# Altium PCB PCBGroupie.PcbDoc
Units mm, origin at the board's own origin, x right, y up, seen from the top; angles counter-clockwise.
Board outline 80.95 x 53.19 mm, 2 copper layers (Top Layer, Bottom Layer), stack 1.57 mm thick; 33 components, 36 nets, 133 pads, 1 vias.
Unrouted connection lines stored in the file: 25.
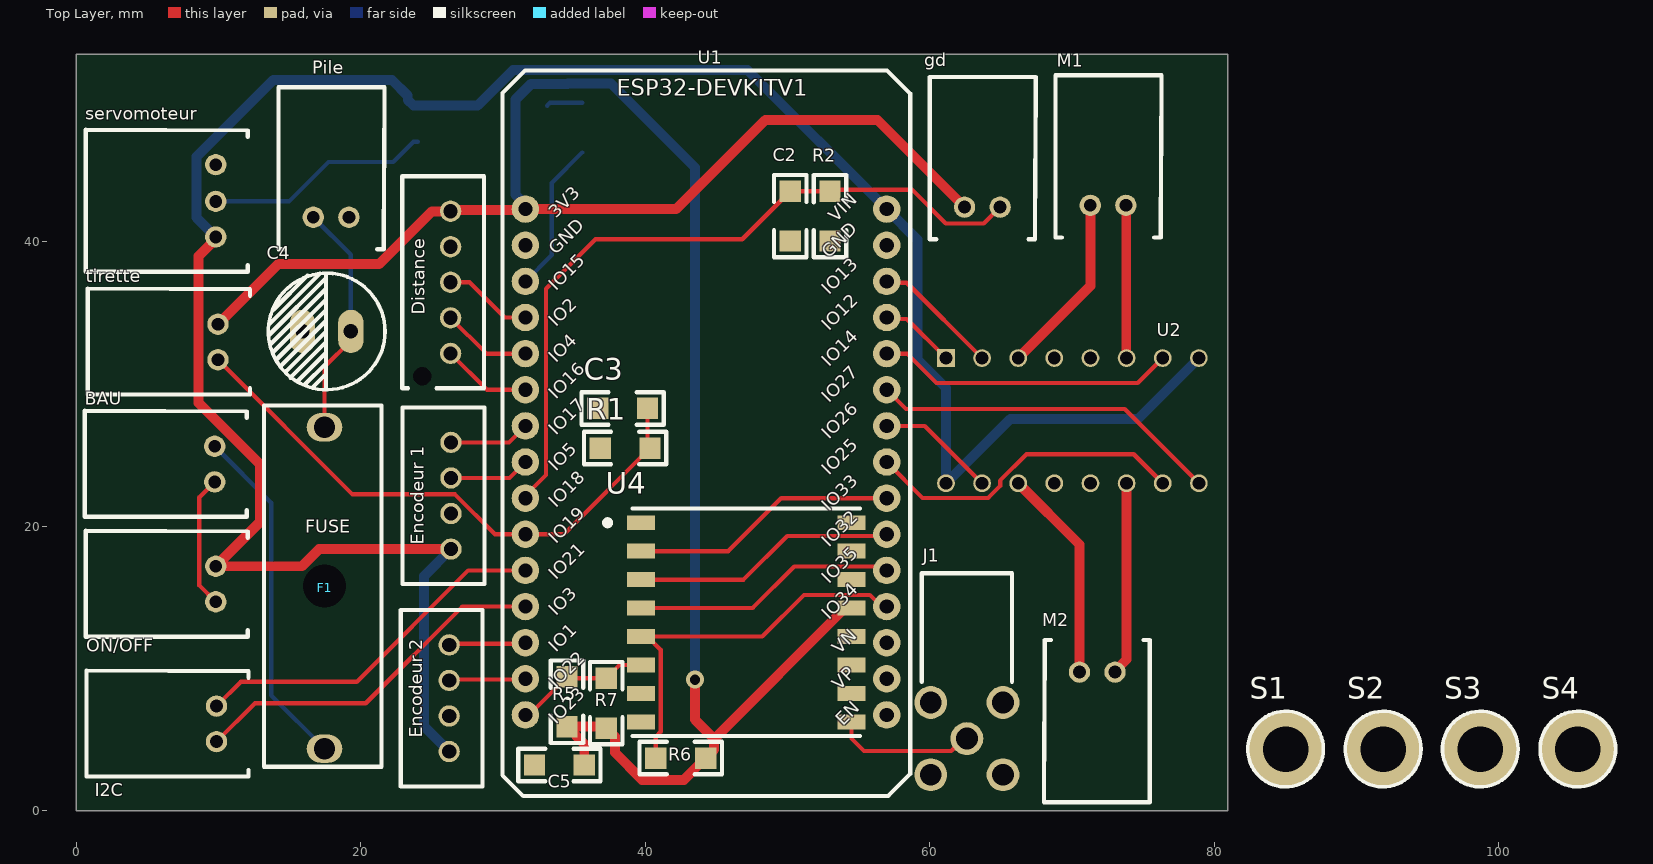
[diagram p0: Top Layer view]
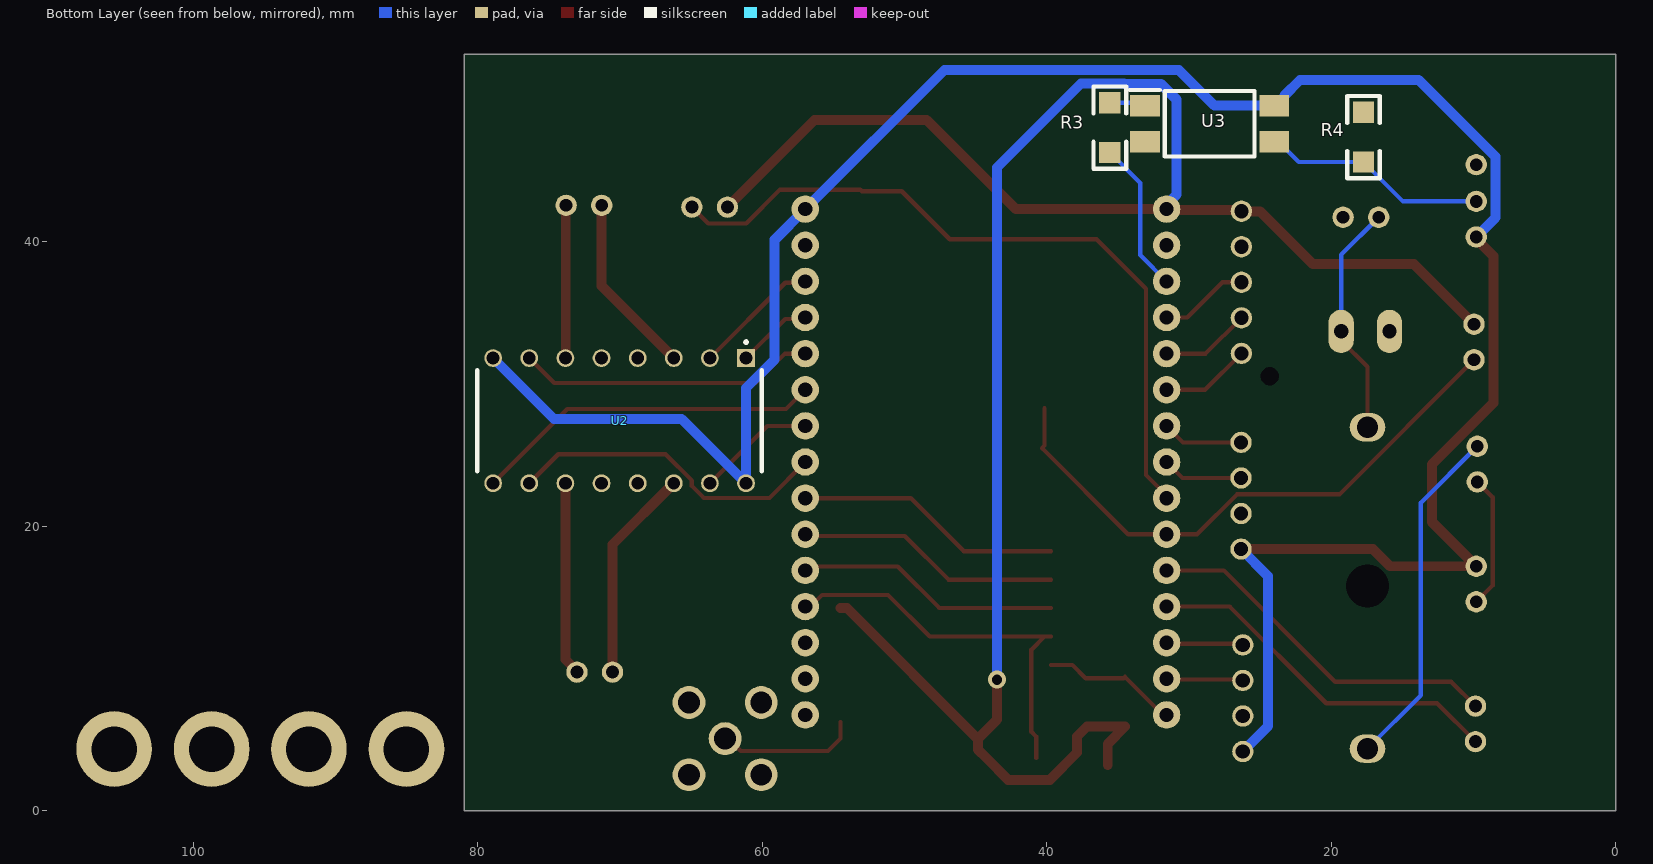
[diagram p1: Bottom Layer view, seen from below]

## Layer stack, top to bottom
Top Solder: solder mask 0.01, Solder Resist, Dk 3.5
Top Layer: signal copper 0.035
Dielectric 1: dielectric 1.5, FR-4, Dk 4.8
Bottom Layer: signal copper 0.035
Bottom Solder: solder mask 0.01, Solder Resist, Dk 3.5

## Board outline
0,0 80.95,0 80.95,53.188 0,53.188

## Design rules (kind name [scope] priority, off if disabled: settings)
Clearance [All] p1: gap=0.254 ignorepadtopadclearanceinfootprint=FALSE
PolygonConnect [All] p1: connectstyle=Relief reliefconductorwidth=0.254 reliefentries=4 polygonreliefangle="90 Angle" airgapwidth=0.254
RoutingVias [All] p1: holewidth=0.711 width=1.27 viastyle="Through Hole" minholewidth=0.711 minwidth=1.27 maxholewidth=0.711 maxwidth=1.27
SolderMaskExpansion [All] p1: expansion=0.102 istentingtop=FALSE
SupplyNets "Schematic Supply Nets_3" [InNet('VCC')] p1: voltage=0.000
SupplyNets "Schematic Supply Nets_2" [InNet('3V')] p2: voltage=0.000
SupplyNets "Schematic Supply Nets_1" [InNet('GND')] p3: voltage=0.000
Width "VCC width" [InNet('VCC')] p1: maxlimit=0.7 minlimit=0.254 preferedwidth=0.7 minimp=50.000000 maximp=50.000000 favimp=50.000000
Width "3V width" [InNet('3V')] p2: maxlimit=0.7 minlimit=0.254 preferedwidth=0.7 minimp=50.000000 maximp=50.000000 favimp=50.000000
30 further rules are at their usual default settings.

## Components (designator, comment, footprint, x,y, rotation, side; value= is the part's Value field where it differs from the comment)
BAU "" S2B-XH-A 9.728,23.129 r90 top
C2 "Cap" "Capacitor 1206" 50.19,41.811 r90 top value=1µF
C3 "Cap" "Capacitor 1206" 38.405,28.296 r0 top value=1µF
C4 "35V" Condensateur 19.3,33.706 r180 top value=100uF
C5 "Cap" "Capacitor 1206" 33.96,3.226 r180 top value=10µF
Distance "Header 5" B5BXHAMLFSN 26.314,32.16 r90 top
"Encodeur 1" "" B4BXHALFSN 26.34,18.404 r90 top
"Encodeur 2" "" B4BXHALFSN 26.213,4.169 r90 top
F1 "2A" Fuse 17.45,4.375 r90 top
gd "" S2B-XH-A 62.448,42.443 r0 top
I2C "" S2B-XH-A 9.855,4.866 r90 top
J1 "0731000114" 0731000114 62.611,5.08 r270 top
M1 "M1" S2B-XH-A 71.287,42.57 r0 top
M2 "M2" S2B-XH-A 73.025,9.754 r180 top
ON/OFF "" S2B-XH-A 9.804,14.696 r90 top
Pile "" S2B-XH-A 16.662,41.732 r0 top
R1 "Res2" "Resistor 1206" 38.583,25.502 r0 top value=10K
R2 "Res2" "Resistor 1206" 52.984,41.808 r90 top value=10K
R3 "Res2" "Resistor 1206" 35.56,48.031 r90 bottom value=150
R4 "Res2" "Resistor 1206" 17.729,47.371 r270 bottom value=10K
R5 "Res2" "Resistor 1206" 34.493,7.671 r90 top value=10K
R6 "Res2" "Resistor 1206" 42.494,3.708 r180 top value=10K
R7 "Res2" "Resistor 1206" 37.262,7.569 r90 top value=10K
S1 "Screw M3" "Screw M3" 85.014,4.343 r0 top
S2 "Screw M3" "Screw M3" 91.872,4.343 r0 top
S3 "Screw M3" "Screw M3" 98.704,4.343 r0 top
S4 "Screw M3" "Screw M3" 105.562,4.343 r0 top
servomoteur "S3B-XH-A" S3B-XH-A 9.804,40.35 r90 top
tirette "" S2B-XH-A 9.957,31.714 r90 top
U1 "ESP32-DEVKITC-32D" MODULE_ESP32-DEVKITV1 44.272,27.305 r0 top
U2 "L293D" DIP880W50P254L2000H510Q16 70.028,27.432 r270 bottom
U3 "FOD817S" SOP254P1016X385-4N 28.55,48.311 r180 bottom
U4 "RFM95W-868S2" XCVR_RFM95W-868S2 47.1,13.255 r0 top

## Footprints (in the part's own frame and the unit in brackets; to place one, negate y for a bottom-side part, rotate by r counter-clockwise, add the part's x,y. Pads: shape width x height; smd on the part's side, far side on the other; paste and mask are expansions set on the pad)
0731000114 [mm]
  round 2.31 hole 1.54: 1(0,0) 2(2.54,2.54) 3(-2.54,2.54) 4(-2.54,-2.54) 5(2.54,-2.54)
  silkscreen extent -11.63,-3.18 -4,3.17, body extent -11.63,-3.21 3.21,3.21, height 9.67
B4BXHALFSN [mm]
  round 1.5 hole 1: 1(0,0) 2(2.5,0) 3(5,0) 4(7.5,0)
  silkscreen extent -2.45,-2.35 9.95,3.4, body extent -2.45,-2.35 9.95,3.4, height 7.52
B5BXHAMLFSN [mm]
  round 1.5 hole 1: 1(0,0) 2(2.5,0) 3(5,0) 4(7.5,0) 5(10,0)
  round 0.65 hole 1.3 unplated: MH1(-1.6,2)
  silkscreen extent -2.45,-2.35 12.45,3.4, body extent -2.45,-2.36 12.45,3.39, height 6.92
"Capacitor 1206" [mm]
  rect 1.5x1.5 smd: 1(-1.75,0) 2(1.75,0)
  silkscreen extent -2.89,-1.14 2.89,1.14, body extent -1.98,-0.99 1.98,0.96, height 1.3
Condensateur [mil]
  oval 70x120 hole 40: 1(0,0) 2(133.86,0)
  silkscreen extent -94,-161 228,161, body extent -93,-160 227,160, height 500
DIP880W50P254L2000H510Q16 [mm]
  rect 1.25x1.25 / inner round 1.25 / far side rect 1.25x1.25 hole 0.9: 1(-4.4,8.89)
  round 1.25 hole 0.9: 2(-4.4,6.35) 3(-4.4,3.81) 4(-4.4,1.27) 5(-4.4,-1.27) 6(-4.4,-3.81) 7(-4.4,-6.35) 8(-4.4,-8.89) 9(4.4,-8.89) 10(4.4,-6.35) 11(4.4,-3.81) 12(4.4,-1.27) 13(4.4,1.27) 14(4.4,3.81) 15(4.4,6.35) 16(4.4,8.89)
  silkscreen extent -5.62,-10 3.55,10, body extent -10,-4.62 10,4.62, height 5.1
Fuse [mm] "Porte-fusible monté sur circuit 10 (UL) A, 6.3 (VDE) A, fusible Cartouche, 893-0574"
  round 2 hole 3: 0(11.43,0)
  oval 2x2.5 hole 1.5: 1(0,0) 2(22.6,0)
  silkscreen extent -1.27,-4 24.13,4.25, body extent -1.27,-4.29 24.13,4.29, height 11.41
MODULE_ESP32-DEVKITV1 [mm]
  round 1.93 / inner round 1.524 / far side round 1.93 hole 1: 1(-12.7,15) 2(-12.7,12.46) 3(-12.7,9.92) 4(-12.7,7.38) 5(-12.7,4.84) 6(-12.7,2.3) 7(-12.7,-0.24) 8(-12.7,-2.78) 9(-12.7,-5.32) 10(-12.7,-7.86) 11(-12.7,-10.4) 12(-12.7,-12.94) 13(-12.7,-15.48) 14(-12.7,-18.02) 15(-12.7,-20.56) 16(12.7,-20.56) 17(12.7,-18.02) 18(12.7,-15.48) 19(12.7,-12.94) 20(12.7,-10.4) 21(12.7,-7.86) 22(12.7,-5.32) 23(12.7,-2.78) 24(12.7,-0.24) 25(12.7,2.3) 26(12.7,4.84) 27(12.7,7.38) 28(12.7,9.92) 29(12.7,12.46) 30(12.7,15)
  silkscreen extent -14.31,-26.26 14.35,24.75, body extent -14.22,-26.09 14.28,24.84, height 7.2
"Resistor 1206" [mm]
  rect 1.5x1.5 smd: 1(-1.75,0) 2(1.75,0)
  silkscreen extent -2.89,-1.14 2.89,1.14, body extent -1.98,-0.95 1.98,0.93, height 0.55
S2B-XH-A [mm]
  round 1.5 hole 0.9: 1(0,0) 2(2.5,0)
  silkscreen extent -2.45,-2.26 5,9.14, body extent -2.41,-2.32 4.99,9.18, height 6.15
S3B-XH-A [mm]
  round 1.5 hole 0.9: 1(0,0) 2(2.5,0) 3(5.08,0)
  silkscreen extent -2.45,-2.26 7.54,9.14, body extent -2.44,-2.27 7.46,9.23, height 6.15
"Screw M3" [mm] "M3 iso Screw"
  round 5.32 hole 3.2 unplated: 0(0,0)
  silkscreen extent -2.66,-2.66 2.66,2.66
SOP254P1016X385-4N [mm]
  rect 2.1x1.5 smd: 1(-4.55,1.27) 2(-4.55,-1.27) 3(4.55,-1.27) 4(4.55,1.27)
  silkscreen extent -5.6,-2.3 3.15,2.37, body extent -5.08,-2.3 5.08,2.3, height 3.85
XCVR_RFM95W-868S2 [mm]
  rect 1.95x1.05 smd: 1(-7.4,7) 2(-7.4,5) 3(-7.4,3) 4(-7.4,1) 5(-7.4,-1) 6(-7.4,-3) 7(-7.4,-5) 8(-7.4,-7) 9(7.4,-7) 10(7.4,-5) 11(7.4,-3) 12(7.4,-1) 13(7.4,1) 14(7.4,3) 15(7.4,5) 16(7.4,7)
  silkscreen extent -10.04,-8 8,8, body extent -8,-8 8,8, height 1.8

## Part data
BAU gd I2C M1 M2 ON/OFF Pile tirette: library part "Header 2H", "Header, 2-Pin, Right Angle", LatestRevisionDate=17-Jul-2002, LatestRevisionNote="Re-released for DXP Platform.", Publisher="Altium Limited"
C2 C3 C5: "Capacitor", LatestRevisionDate=17-Jul-2002, LatestRevisionNote="Re-released for DXP Platform.", PackageDescription="Radial Cap, Thru-Hole; 2 Leads; 0.3 in Pin Spacing", PackageReference=RAD-0.3, Published=8-Jun-2000, Publisher="Altium Limited"
C4: library part "Cap Pol1", "Polarized Capacitor (Radial)", LatestRevisionDate=17-Jul-2002, LatestRevisionNote="Re-released for DXP Platform.", PackageDescription="Polarized Capacitor (Radial); 2 Leads", PackageReference=RB7.6-15, Published=8-Jun-2000, Publisher="Altium Limited"
Distance: "Header, 5-Pin", LatestRevisionDate=17-Jul-2002, LatestRevisionNote="Re-released for DXP Platform.", Publisher="Altium Limited"
"Encodeur 1" "Encodeur 2": library part "Header 4H", "Header, 4-Pin, Right Angle", LatestRevisionDate=17-Jul-2002, LatestRevisionNote="Re-released for DXP Platform.", Publisher="Altium Limited"
F1: library part "Fuse 2", "Fuse", LatestRevisionDate=17-Jul-2002, LatestRevisionNote="Re-released for DXP Platform.", PackageDescription="Thru-Hole; 2 Leads", PackageReference=PIN-W2/E2.8, Published=8-Jun-2000, Publisher="Altium Limited"
J1: "Connector", Manufacturer_Name=Molex, Mouser Part Number=N/A, Arrow Part Number=0731000114, Arrow Price/Stock=https://www.arrow.com/en/products/0731000114/molex?region=europe, Datasheet Link=https://www.molex.com/pdm_docs/sd/731000114_sd.pdf, Height=9.57mm, Manufacturer_Part_Number=0731000114, Mouser Price/Stock=https://www.mouser.co.uk/ProductDetail/Molex/0731000114?qs=PBcRNPEHKspjQWXqYv3LPw%3D%3D
R1 R2 R3 R4 R5 R6 R7: "Resistor", LatestRevisionDate=17-Jul-2002, LatestRevisionNote="Re-released for DXP Platform.", PackageDescription="Axial Device, Thru-Hole; 2 Leads; 0.4 in Pin Spacing", PackageReference=AXIAL-0.4, Published=8-Jun-2000, Publisher="Altium Limited"
servomoteur: library part "Header 3H", "Header, 3-Pin, Right Angle", LatestRevisionDate=17-Jul-2002, LatestRevisionNote="Re-released for DXP Platform.", Publisher="Altium Limited"
U1: "Eval Board For Esp-Wroom-32", Package=None, Availability=Unavailable, MF="Espressif Systems", MP=ESP32-DEVKITC-32D, Price=None, SnapEDA_Link=https://www.snapeda.com/parts/ESP32-DEVKITC-32D/Espressif%20Systems/view-part/?ref=snap
U2: "Bipolar Motor Driver - Parallel 16-PowerDIP", Package="DIP-16 STMicroelectronics", Availability="In Stock", Check_prices=https://www.snapeda.com/parts/L293D/STMicroelectronics/view-part/?ref=eda, MF=STMicroelectronics, MP=L293D, Price=None, Purchase-URL=https://pricing.snapeda.com/search/part/L293D/?ref=eda, SnapEDA_Link=https://www.snapeda.com/parts/L293D/STMicroelectronics/view-part/?ref=snap
U3: library part Optoisolator1, "4-Pin Phototransistor Optocoupler", DatasheetVersion=Nov-2003, LatestRevisionDate=04-Mar-2005, LatestRevisionNote="Sch pins 3 & 4 Swapped.", PackageReference=DIP-4, Published=24-Mar-1999, Publisher="Altium Limited"
U4: "General ISM < 1GHz LoRaâ„¢ Transceiver Module 868MHz Antenna Not Included Surface Mount", Package="Non Standard RF Solutions", Availability="In Stock", Check_prices=https://www.snapeda.com/parts/RFM95W-868S2/RF+Solutions/view-part/?ref=eda, MF=RF, MP=RFM95W-868S2, Price=None, Purchase-URL=https://pricing.snapeda.com/search?q=RFM95W-868S2&ref=eda, SnapEDA_Link=https://www.snapeda.com/parts/RFM95W-868S2/RF+Solutions/view-part/?ref=snap

## Via types
v1: diameter 1.27, hole 0.711, Top Layer to Bottom Layer, 1 vias

## Nets (pads, with @x,y where several pads share a name; then routed paths per layer and width w, separated by ;. In a path a pad name is that pad's centre, name@x,y a point inside that pad or via, vN(x,y) a via of type N, cw(c..) or ccw(c..) an arc to the next point about the centre after c; other vN are vias at no path point)
3V: C5.1 Distance.5 gd.1 R5.1 R6.1 R7.1 tirette.2 U1.1 U4.13 | length 156.1
  Top Layer w0.7: tirette.2 14.173,38.43 21.278,38.43 24.996,42.148 26.302,42.148 26.387,42.233 31.5,42.233 U1.1 42.178,42.305 48.438,48.565 56.326,48.565 gd.1 ; C5.1 35.71,4.704 R5.1 37.16,5.921 37.862,5.219 37.862,4.099 39.776,2.184 42.72,2.184 R6.1 44.844,4.308 44.844,5.049 ; v1(43.485,9.22) 43.485,6.408 44.844,5.049 ; U4.13 54.05,14.255 44.844,5.049
  Bottom Layer w0.7: U1.1 31.572,42.619 30.861,43.33 30.861,49.996 31.981,51.116 34.54,51.116 34.56,51.135 37.588,51.135 43.485,45.239 v1(43.485,9.22)
cs_lora: R6.2 U1.19 U4.5 | length 27.9
  Top Layer w0.3: U4.5 U4.5@40.15,12.255 ; R6.2 40.744,5.228 41.079,5.563 41.079,11.326 U4.5@40.15,12.255 ; U1.19 56.609,14.365 55.79,15.184 51.15,15.184 48.221,12.255 U4.5@40.15,12.255
"enable 1": U1.27 U2.1 | length 5.3
  Top Layer w0.3: U1.27 57.075,34.582 58.387,34.582 U2.1
"enable 2": U1.25 U2.9 | length 24.7
  Top Layer w0.3: U1.25 58.332,28.245 73.705,28.245 U2.9
  Bottom Layer w0.3: U1.25@56.947,29.591 56.961,29.605 U1.25
ESP_PWM: R3.1 U1.3 | length 10.7
  Bottom Layer w0.3: U1.3 33.422,39.075 33.422,44.143 R3.1
GND: "Encodeur 1.2" "Encodeur 2.2" C2.1 C3.1 C4.2 C5.2 Distance.4 J1.2 J1.3 J1.4 J1.5 Pile.2 R1.1 R2.1 R4.1 servomoteur.3 U1.2 U1.29 U2.4 U2.5 U2.12 U2.13 U3.2 U4.1 U4.8 U4.10
I2C_INT: Distance.3 U1.4 | length 6.3
  Top Layer w0.3: Distance.3 27.647,37.16 30.123,34.685 U1.4
I2C_LPN: Distance.1 U1.6 | length 6.3
  Top Layer w0.3: Distance.1 28.87,29.605 U1.6
I2C_RST: Distance.2 U1.5 | length 6.3
  Top Layer w0.3: Distance.2 28.83,32.145 U1.5
I2C_SCL: I2C.2 U1.11 | length 25.7
  Top Layer w0.3: I2C.2 11.557,9.068 19.71,9.068 27.548,16.905 U1.11
I2C_SDA: I2C.1 U1.12 | length 25.7
  Top Layer w0.3: I2C.1 12.558,7.569 20.345,7.569 27.141,14.365 U1.12
miso_lora: U1.22 U4.2 | length 18.8
  Top Layer w0.3: U4.2 45.824,18.255 49.554,21.985 U1.22
mosi_lora: U1.21 U4.3 | length 18.6
  Top Layer w0.3: U4.3 46.908,16.255 49.979,19.326 56.853,19.326 U1.21
NetBAU_1: BAU.1 ON/OFF.1 | length 9.4
  Top Layer w0.3: BAU.1 8.65,22.051 8.65,15.85 ON/OFF.1
NetBAU_2: BAU.2 F1.1 | length 24.5
  Bottom Layer w0.3: BAU.2 13.704,21.653 13.704,8.121 F1.1
NetC4_1: C4.1 F1.2 Pile.1 | length 16.6
  Top Layer w0.3: F1.2 17.45,31.22 19.3,33.071 C4.1
  Bottom Layer w0.3: Pile.1 19.3,39.094 C4.1
"NetEncodeur 1_3": "Encodeur 1.3" U1.8 | length 5.7
  Top Layer w0.3: 26.34,23.404 30.451,23.404 U1.8
"NetEncodeur 1_4": "Encodeur 1.4" U1.7 | length 5.7
  Top Layer w0.3: 26.34,25.904 30.411,25.904 U1.7
"NetEncodeur 2_3": "Encodeur 2.3" U1.14 | length 5.4
  Top Layer w0.3: 26.213,9.169 26.271,9.227 31.514,9.227 U1.14
"NetEncodeur 2_4": "Encodeur 2.4" U1.13 | length 5.4
  Top Layer w0.3: 26.213,11.669 26.291,11.747 31.494,11.747 U1.13
NetJ1_1: J1.1 U4.9 | length 10
  Top Layer w0.3: U4.9 54.5,5.088 55.372,4.216 61.513,4.216 62.376,5.08 J1.1
NetM1_1: M1.1 U2.3 | length 12.8
  Top Layer w0.7: U2.3 71.287,36.901 M1.1
NetM1_2: M1.2 U2.6 | length 10.8
  Top Layer w0.7: M1.2 73.812,42.545 73.812,31.857 U2.6
NetM2_1: M2.1 U2.11 | length 13.6
  Top Layer w0.7: M2.1 73.025,9.825 73.838,10.638 U2.11
NetM2_2: M2.2 U2.14 | length 15.1
  Top Layer w0.7: U2.14 70.525,18.725 M2.2
NetR3_2: R3.2 U3.1 | length 2.5
  Bottom Layer w0.3: U3.1 33.3,49.781 R3.2
OPT_PWM: R4.2 servomoteur.2 U3.3 | length 15.9
  Bottom Layer w0.3: servomoteur.2 14.958,42.85 R4.2 22.28,45.621 23.7,47.041 U3.3
reset_lora: R5.2 R7.2 U1.15 U4.6 | length 9.7
  Top Layer w0.3: U1.15 31.817,6.745 R5.2 34.595,9.319 R7.2 38.198,10.255 U4.6
sck_lora: U1.20 U4.4 | length 18.9
  Top Layer w0.3: U4.4 47.548,14.255 50.477,17.184 56.693,17.184 U1.20 U1.20@56.972,16.656
"Sens1 M1": U1.28 U2.2 | length 8.9
  Top Layer w0.3: U1.28 57.075,37.122 58.387,37.122 U2.2
"Sens1 M2": U1.23 U2.10 | length 22.8
  Top Layer w0.3: U1.23 59.494,22.003 64.104,22.003 64.948,22.847 64.948,23.217 66.8,25.07 74.34,25.07 U2.10
"Sens2 M1": U1.26 U2.7 | length 21
  Top Layer w0.3: U1.26 58.406,32.145 60.477,30.074 74.619,30.074 U2.7
"Sens2 M2": U1.24 U2.15 | length 8.4
  Top Layer w0.3: U1.24 59.645,27.065 U2.15
switch_gd: C2.2 gd.2 R2.2 U1.9 | length 51.6
  Top Layer w0.3: U1.9 31.572,22.16 33.02,23.608 33.02,36.701 36.501,40.183 46.812,40.183 C2.2 50.193,43.558 R2.2 53.1,43.674 58.745,43.674 61.129,41.289 63.794,41.289 gd.2
tirette: C3.2 R1.2 tirette.1 U1.10 | length 40.8
  Top Layer w0.3: tirette.1 19.42,22.25 26.626,22.25 29.431,19.445 U1.10 34.276,19.445 R1.2 40.155,25.679 C3.2
VCC: "Encodeur 1.1" "Encodeur 2.1" ON/OFF.2 servomoteur.1 U1.30 U2.8 U2.16 U3.4 | length 164.9
  Top Layer w0.7: servomoteur.1 9.804,40.207 8.603,39.006 8.603,28.669 12.929,24.343 12.929,20.32 ON/OFF.2 15.865,17.196 17.074,18.404 26.34,18.404
  Bottom Layer w0.7: servomoteur.1 8.45,41.704 8.45,45.991 13.844,51.384 22.196,51.384 23.3,50.281 23.3,49.981 23.7,49.581 U3.4 28.219,49.581 30.709,52.07 34.145,52.07 34.165,52.089 47.188,52.089 U1.30 59.123,40.154 59.123,31.742 61.138,29.728 U2.16 65.665,27.559 74.645,27.559 U2.8 ; 26.213,4.169 24.435,5.947 24.435,16.499 26.34,18.404
pads on no net: Distance.MH1 F1.0 S1.0 S2.0 S3.0 S4.0 U1.16 U1.17 U1.18 U4.7 U4.11 U4.12 U4.14 U4.15 U4.16

## Text inside footprints (layer, text, board x,y; h text height)
F1: Top Overlay "FUSE" at 16.078,19.228 h1.52
U1: Top Overlay "EN" at 54.122,5.715 h1.57 r45; Top Overlay "VP" at 53.872,8.185 h1.57 r45; Top Overlay "VN" at 53.872,10.725 h1.57 r45; Top Overlay "IO34" at 53.152,13.155 h1.57 r45; Top Overlay "IO35" at 53.152,15.695 h1.57 r45; Top Overlay "IO32" at 53.152,18.235 h1.57 r45; Top Overlay "IO33" at 53.152,20.775 h1.57 r45; Top Overlay "IO25" at 53.152,23.315 h1.57 r45; Top Overlay "IO26" at 53.152,25.855 h1.57 r45; Top Overlay "IO27" at 53.152,28.395 h1.57 r45; Top Overlay "IO14" at 53.152,30.935 h1.57 r45; Top Overlay "IO12" at 53.152,33.475 h1.57 r45; Top Overlay "IO13" at 53.152,36.015 h1.57 r45; Top Overlay "GND" at 53.152,38.555 h1.57 r45; Top Overlay "VIN" at 53.642,41.105 h1.57 r45; Top Overlay "IO23" at 33.954,5.793 h1.57 r45; Top Overlay "IO22" at 33.942,8.345 h1.57 r45; Top Overlay "IO1" at 33.942,10.885 h1.57 r45; Top Overlay "IO3" at 33.942,13.425 h1.57 r45; Top Overlay "IO21" at 33.942,15.965 h1.57 r45; Top Overlay "IO19" at 33.942,18.505 h1.57 r45; Top Overlay "IO18" at 33.942,21.045 h1.57 r45; Top Overlay "IO5" at 33.942,23.585 h1.57 r45; Top Overlay "IO17" at 33.942,26.125 h1.57 r45; Top Overlay "IO16" at 33.942,28.665 h1.57 r45; Top Overlay "IO4" at 33.942,31.205 h1.57 r45; Top Overlay "IO2" at 33.942,33.745 h1.57 r45; Top Overlay "IO15" at 33.942,36.285 h1.57 r45; Top Overlay "GND" at 33.942,38.825 h1.57 r45; Top Overlay "3V3" at 33.942,41.365 h1.57 r45; Top Overlay "ESP32-DEVKITV1" at 37.982,49.875 h1.97